# EAGLE board PCB Plates Combined Eagle (EAGLE 9.4.2)
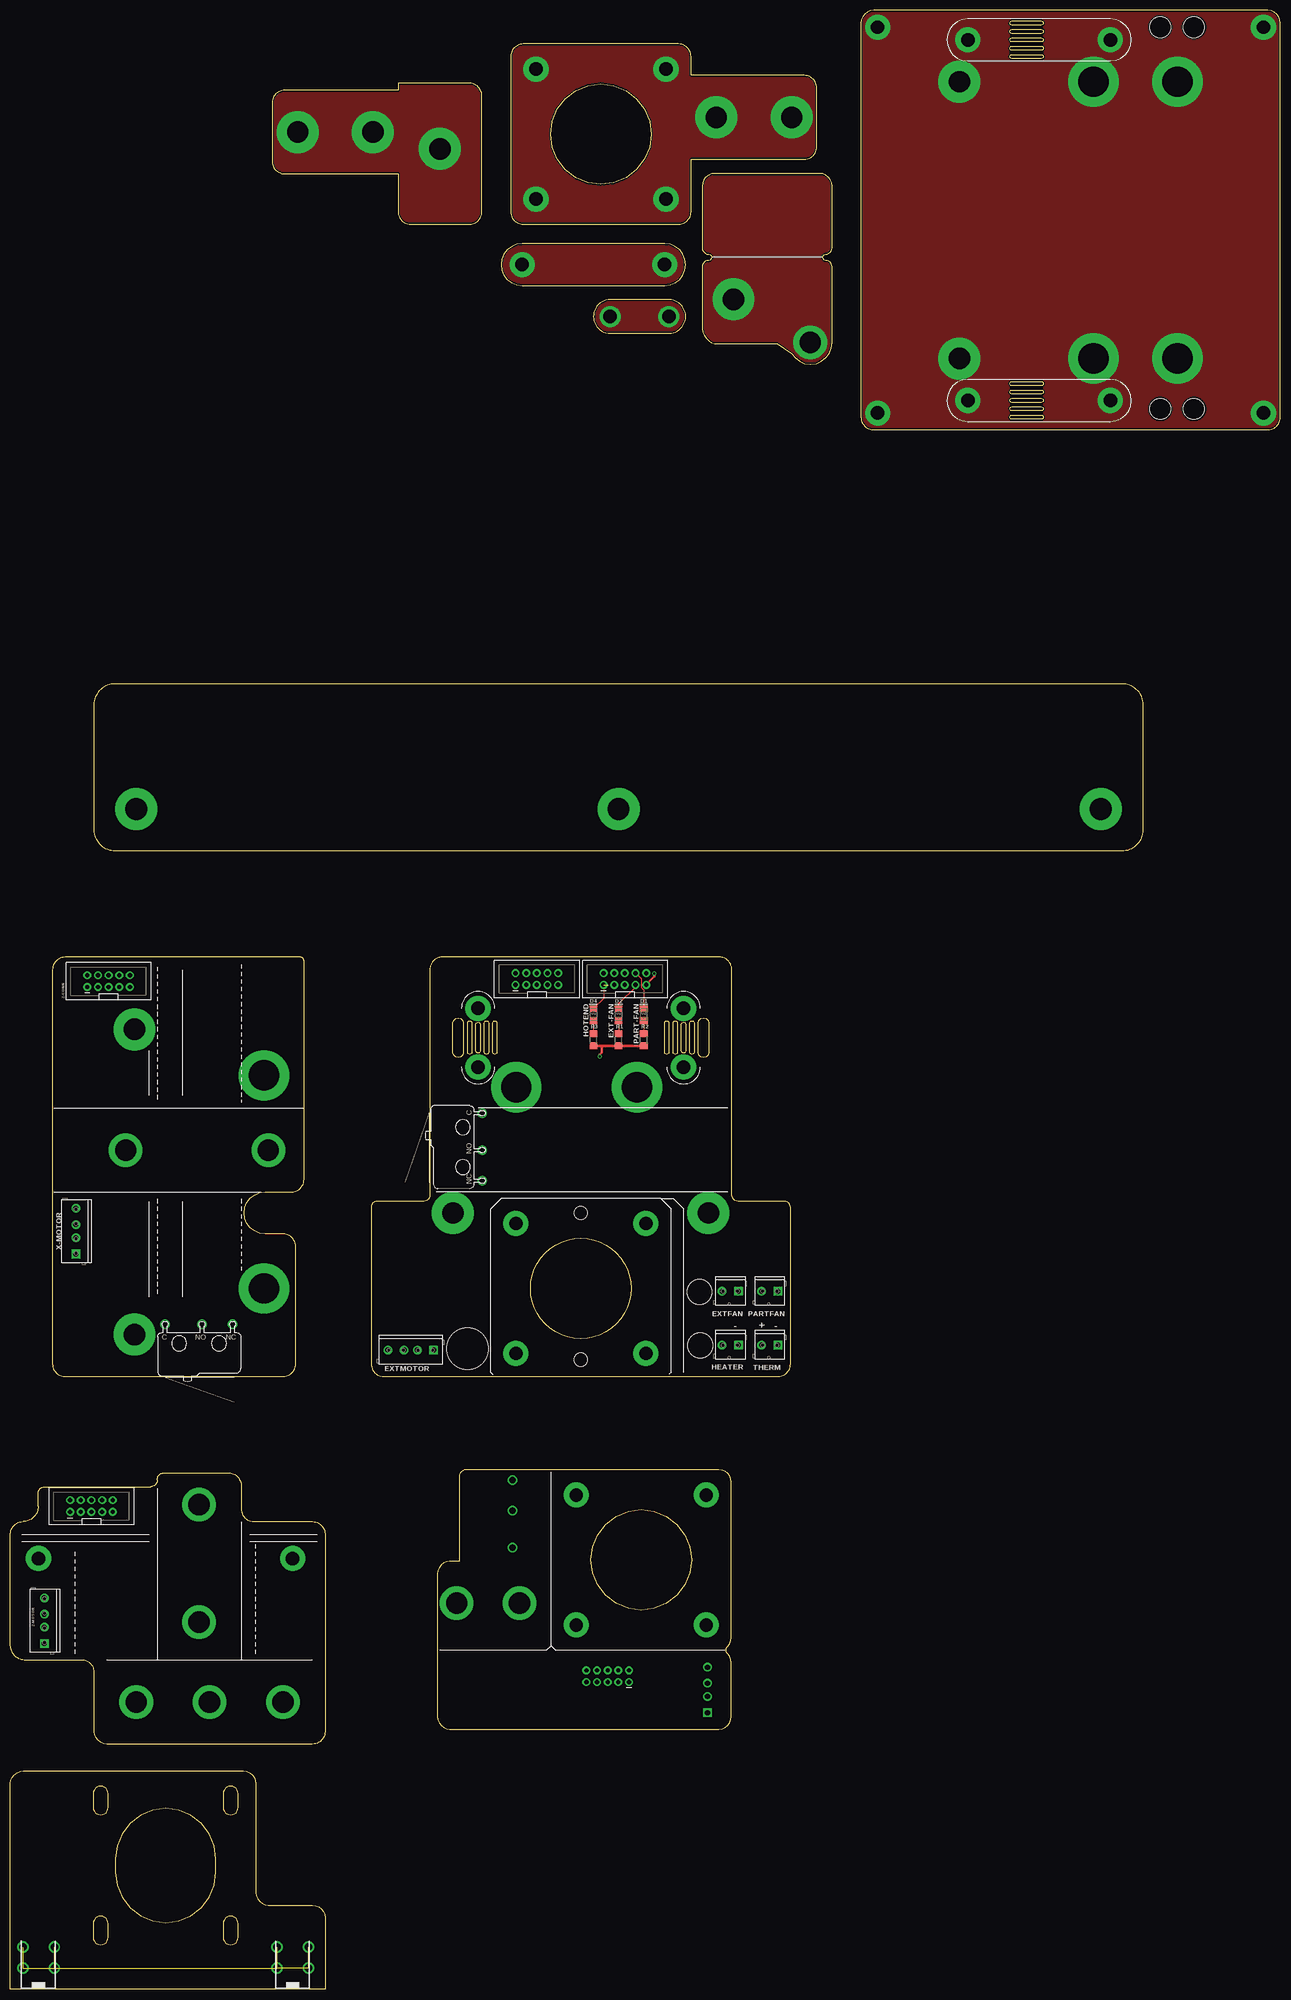
[diagram p0: board, top side]
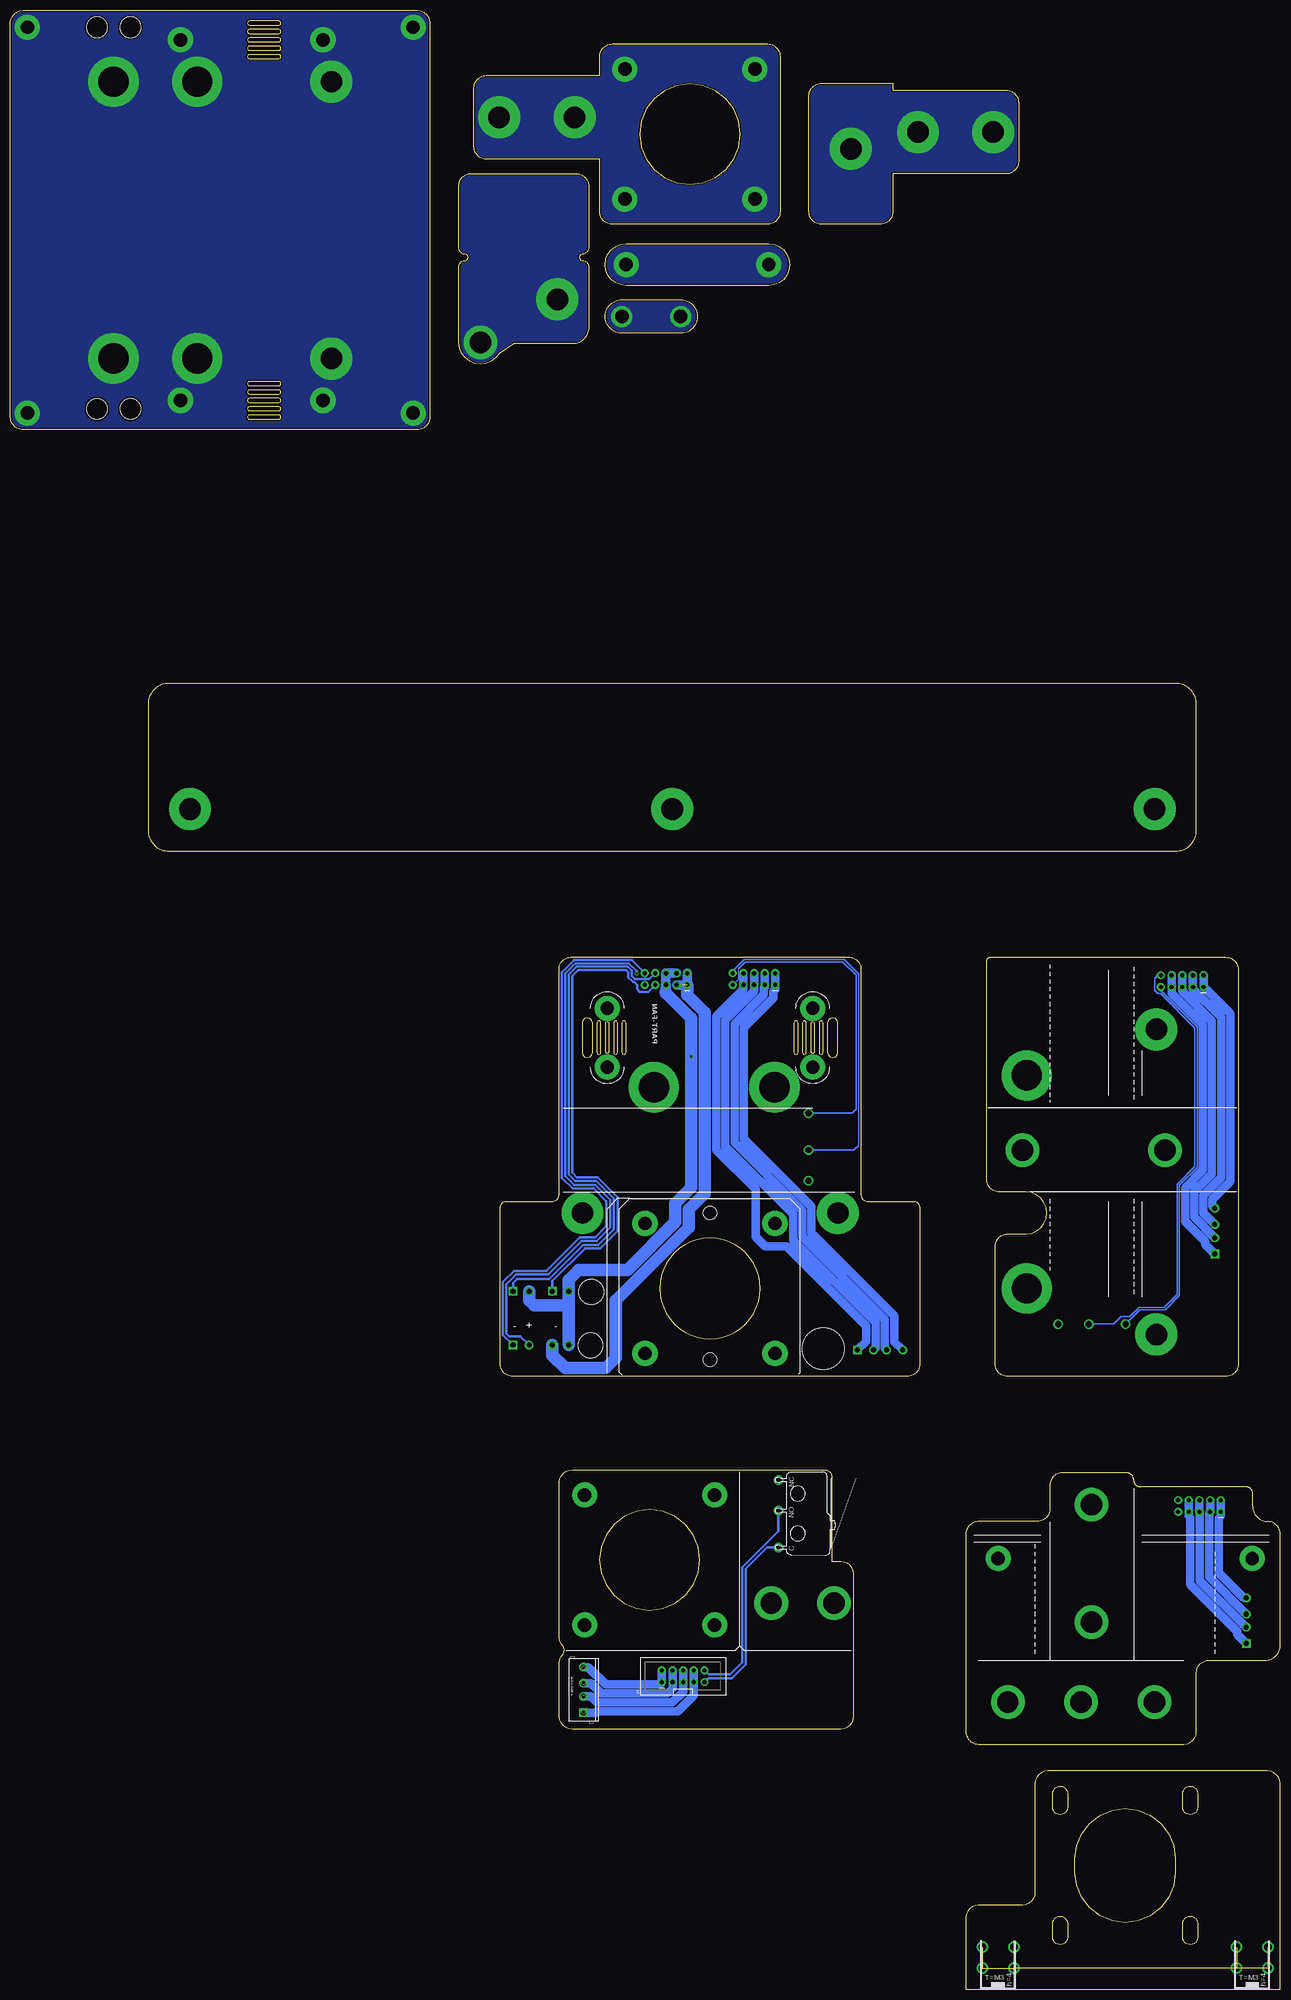
[diagram p1: board, bottom side, seen from below]

Size 302.8 x 471.9 mm. Coordinates in mm from the lower left corner, seen from the top.
Outline: 157,402.92 143,402.92 142.48,402.88 141.97,402.78 141.47,402.61 141,402.38 140.56,402.09 140.17,401.75 139.83,401.35 139.54,400.92 139.3,400.45 139.14,399.95 139.03,399.44 139,398.92 139.03,398.39 139.14,397.88 139.3,397.38 139.54,396.92 139.83,396.48 140.17,396.09 140.56,395.74 141,395.45 141.47,395.22 141.97,395.05 142.48,394.95 143,394.92 157,394.92 157.52,394.95 158.03,395.05 158.53,395.22 159,395.45 159.44,395.74 159.83,396.09 160.17,396.48 160.46,396.92 160.7,397.38 160.86,397.88 160.97,398.39 161,398.92 160.97,399.44 160.86,399.95 160.7,400.45 160.46,400.92 160.17,401.35 159.83,401.75 159.44,402.09 159,402.38 158.53,402.61 158.03,402.78 157.52,402.88 157,402.92
Outline: 122,416.28 120.71,416.11 119.5,415.61 118.46,414.82 117.67,413.78 117.17,412.57 117,411.28 117.17,409.99 117.67,408.78 118.46,407.75 119.5,406.95 120.71,406.45 122,406.28 156,406.28 157.29,406.45 158.5,406.95 159.54,407.75 160.33,408.78 160.83,409.99 161,411.28 160.83,412.57 160.33,413.78 159.54,414.82 158.5,415.61 157.29,416.11 156,416.28 122,416.28
Outline: 100,243.2 100,189.4 99.95,189.01 99.8,188.65 99.56,188.34 99.25,188.1 98.89,187.95 98.5,187.9 87.5,187.9 87.11,187.85 86.75,187.7 86.44,187.46 86.2,187.15 86.05,186.79 86,186.4 86,149.1 86.03,148.71 86.1,148.32 86.23,147.95 86.4,147.6 86.62,147.27 86.88,146.98 87.17,146.72 87.5,146.5 87.85,146.33 88.22,146.2 88.61,146.13 89,146.1 183,146.1 183.39,146.13 183.78,146.2 184.15,146.33 184.5,146.5 184.83,146.72 185.12,146.98 185.38,147.27 185.6,147.6 185.77,147.95 185.9,148.32 185.97,148.71 186,149.1 186,186.4 185.95,186.79 185.8,187.15 185.56,187.46 185.25,187.7 184.89,187.85 184.5,187.9 173.5,187.9 173.11,187.95 172.75,188.1 172.44,188.34 172.2,188.65 172.05,189.01 172,189.4 172,243.2 arc90 169.1,246.1 102.9,246.1 arc90 100,243.2
Outline: 144.49,175.58 145.52,174.4 146.39,173.1 147.09,171.69 147.59,170.21 147.9,168.67 148,167.1 147.9,165.53 147.59,163.99 147.09,162.51 146.39,161.1 145.52,159.79 144.49,158.61 143.31,157.58 142,156.71 140.59,156.01 139.11,155.51 137.57,155.2 136,155.1 134.43,155.2 132.89,155.51 131.41,156.01 130,156.71 128.69,157.58 127.52,158.61 126.48,159.79 125.61,161.1 124.91,162.51 124.41,163.99 124.1,165.53 124,167.1 124.1,168.67 124.41,170.21 124.91,171.69 125.61,173.1 126.48,174.4 127.52,175.58 128.69,176.62 130,177.49 131.41,178.19 132.89,178.69 134.43,179 136,179.1 137.57,179 139.11,178.69 140.59,178.19 142,177.49 143.31,176.62 144.49,175.58
Outline: 109.07,223.15 109,223.4 109,230.4 109.07,230.65 109.25,230.83 109.5,230.9 109.75,230.83 109.93,230.65 110,230.4 110,223.4 109.93,223.15 109.75,222.97 109.5,222.9 109.25,222.97 109.07,223.15
Outline: 162.75,222.97 162.5,222.9 162.25,222.97 162.07,223.15 162,223.4 162,230.4 162.07,230.65 162.25,230.83 162.5,230.9 162.75,230.83 162.93,230.65 163,230.4 163,223.4 162.93,223.15 162.75,222.97
Outline: 160,223.7 160,230.1 160.07,230.35 160.25,230.53 160.5,230.6 160.75,230.53 160.93,230.35 161,230.1 161,223.7 160.93,223.45 160.75,223.27 160.5,223.2 160.25,223.27 160.07,223.45 160,223.7
Outline: 164.62,231.48 165.25,231.65 165.88,231.48 166.33,231.02 166.5,230.4 166.5,223.4 166.33,222.77 165.88,222.32 165.25,222.15 164.62,222.32 164.17,222.77 164,223.4 164,230.4 164.17,231.02 164.62,231.48
Outline: 106.12,231.48 106.75,231.65 107.38,231.48 107.83,231.02 108,230.4 108,223.4 107.83,222.77 107.38,222.32 106.75,222.15 106.12,222.32 105.67,222.77 105.5,223.4 105.5,230.4 105.67,231.02 106.12,231.48
Outline: 113,230.4 113.07,230.65 113.25,230.83 113.5,230.9 113.75,230.83 113.93,230.65 114,230.4 114,223.4 113.93,223.15 113.75,222.97 113.5,222.9 113.25,222.97 113.07,223.15 113,223.4 113,230.4
Outline: 111.5,230.6 111.75,230.53 111.93,230.35 112,230.1 112,223.7 111.93,223.45 111.75,223.27 111.5,223.2 111.25,223.27 111.07,223.45 111,223.7 111,230.1 111.07,230.35 111.25,230.53 111.5,230.6
Outline: 156,230.4 156.07,230.65 156.25,230.83 156.5,230.9 156.75,230.83 156.93,230.65 157,230.4 157,223.4 156.93,223.15 156.75,222.97 156.5,222.9 156.25,222.97 156.07,223.15 156,223.4 156,230.4
Outline: 115.75,230.83 115.93,230.65 116,230.4 116,223.4 115.93,223.15 115.75,222.97 115.5,222.9 115.25,222.97 115.07,223.15 115,223.4 115,230.4 115.07,230.65 115.25,230.83 115.5,230.9 115.75,230.83
Outline: 158.75,230.83 158.93,230.65 159,230.4 159,223.4 158.93,223.15 158.75,222.97 158.5,222.9 158.25,222.97 158.07,223.15 158,223.4 158,230.4 158.07,230.65 158.25,230.83 158.5,230.9 158.75,230.83
Outline: 70,193.1 70,245.2 arc90 69.1,246.1 13,246.1 12.61,246.07 12.22,246 11.85,245.87 11.5,245.7 11.17,245.48 10.88,245.22 10.62,244.93 10.4,244.6 10.23,244.25 10.1,243.88 10.03,243.49 10,243.1 10,149.1 10.03,148.71 10.1,148.32 10.23,147.95 10.4,147.6 10.62,147.27 10.88,146.98 11.17,146.72 11.5,146.5 11.85,146.33 12.22,146.2 12.61,146.13 13,146.1 65,146.1 65.39,146.13 65.78,146.2 66.15,146.33 66.5,146.5 66.83,146.72 67.12,146.98 67.38,147.27 67.6,147.6 67.77,147.95 67.9,148.32 67.97,148.71 68,149.1 68,177.1 67.97,177.49 67.9,177.88 67.77,178.25 67.6,178.6 67.38,178.93 67.12,179.22 66.83,179.48 66.5,179.7 66.15,179.87 65.78,180 65.39,180.07 65,180.1 60.7,180.1 59.41,180.27 58.2,180.77 57.16,181.56 56.37,182.6 55.87,183.81 55.7,185.1 55.87,186.39 56.37,187.6 57.16,188.64 58.2,189.43 59.41,189.93 60.7,190.1 67,190.1 67.39,190.13 67.78,190.2 68.15,190.33 68.5,190.5 68.83,190.72 69.12,190.98 69.38,191.27 69.6,191.6 69.77,191.95 69.9,192.32 69.97,192.71 70,193.1
Outline: 168.9,123.85 108.6,123.85 108.19,123.79 107.8,123.63 107.47,123.38 107.21,123.05 107.06,122.66 107,122.25 107,102 104.8,102 104.02,101.9 103.3,101.6 102.68,101.12 102.2,100.5 101.9,99.78 101.8,99 101.8,65 101.9,64.22 102.2,63.5 102.68,62.88 103.3,62.4 104.02,62.1 104.8,62 168.9,62 169.68,62.1 170.4,62.4 171.02,62.88 171.5,63.5 171.8,64.22 171.9,65 171.9,77.85 171.8,78.62 171.5,79.35 171.02,79.97 170.82,80.22 170.7,80.52 170.66,80.85 170.7,81.17 170.82,81.47 171.02,81.72 171.5,82.35 171.8,83.07 171.9,83.85 171.9,120.85 171.8,121.62 171.5,122.35 171.02,122.97 170.4,123.44 169.68,123.74 168.9,123.85
Outline: 138.4,102.35 138.81,105.45 140.01,108.35 141.92,110.83 144.4,112.74 147.29,113.94 150.4,114.35 153.51,113.94 156.4,112.74 158.88,110.83 160.79,108.35 161.99,105.45 162.4,102.35 161.99,99.24 160.79,96.35 158.88,93.86 156.4,91.95 153.51,90.75 150.4,90.35 147.29,90.75 144.4,91.95 141.92,93.86 140.01,96.35 138.81,99.24 138.4,102.35
Outline: 205.8,371.9 299.8,371.9 300.19,371.93 300.58,372 300.95,372.13 301.3,372.3 301.63,372.52 301.92,372.78 302.18,373.07 302.4,373.4 302.57,373.75 302.7,374.12 302.77,374.51 302.8,374.9 302.8,468.9 302.7,469.68 302.4,470.4 301.92,471.02 301.3,471.5 300.58,471.8 299.8,471.9 205.8,471.9 205.02,471.8 204.3,471.5 203.68,471.02 203.2,470.4 202.9,469.68 202.8,468.9 202.8,374.9 202.83,374.51 202.9,374.12 203.03,373.75 203.2,373.4 203.42,373.07 203.68,372.78 203.97,372.52 204.3,372.3 204.65,372.13 205.02,372 205.41,371.93 205.8,371.9
Outline: 245.8,378.4 238.8,378.4 238.55,378.47 238.37,378.65 238.3,378.9 238.37,379.15 238.55,379.33 238.8,379.4 245.8,379.4 246.05,379.33 246.23,379.15 246.3,378.9 246.23,378.65 246.05,378.47 245.8,378.4
Outline: 246.23,377.15 246.3,376.9 246.23,376.65 246.05,376.47 245.8,376.4 238.8,376.4 238.55,376.47 238.37,376.65 238.3,376.9 238.37,377.15 238.55,377.33 238.8,377.4 245.8,377.4 246.05,377.33 246.23,377.15
Outline: 246.23,375.15 246.3,374.9 246.23,374.65 246.05,374.47 245.8,374.4 238.8,374.4 238.55,374.47 238.37,374.65 238.3,374.9 238.37,375.15 238.55,375.33 238.8,375.4 245.8,375.4 246.05,375.33 246.23,375.15
Outline: 246.23,381.15 246.3,380.9 246.23,380.65 246.05,380.47 245.8,380.4 238.8,380.4 238.55,380.47 238.37,380.65 238.3,380.9 238.37,381.15 238.55,381.33 238.8,381.4 245.8,381.4 246.05,381.33 246.23,381.15
Outline: 246.23,383.15 246.3,382.9 246.23,382.65 246.05,382.47 245.8,382.4 238.8,382.4 238.55,382.47 238.37,382.65 238.3,382.9 238.37,383.15 238.55,383.33 238.8,383.4 245.8,383.4 246.05,383.33 246.23,383.15
Outline: 246.23,469.15 246.3,468.9 246.23,468.65 246.05,468.47 245.8,468.4 238.8,468.4 238.55,468.47 238.37,468.65 238.3,468.9 238.37,469.15 238.55,469.33 238.8,469.4 245.8,469.4 246.05,469.33 246.23,469.15
Outline: 246.23,467.15 246.3,466.9 246.23,466.65 246.05,466.47 245.8,466.4 238.8,466.4 238.55,466.47 238.37,466.65 238.3,466.9 238.37,467.15 238.55,467.33 238.8,467.4 245.8,467.4 246.05,467.33 246.23,467.15
Outline: 246.23,465.15 246.3,464.9 246.23,464.65 246.05,464.47 245.8,464.4 238.8,464.4 238.55,464.47 238.37,464.65 238.3,464.9 238.37,465.15 238.55,465.33 238.8,465.4 245.8,465.4 246.05,465.33 246.23,465.15
Outline: 246.23,463.15 246.3,462.9 246.23,462.65 246.05,462.47 245.8,462.4 238.8,462.4 238.55,462.47 238.37,462.65 238.3,462.9 238.37,463.15 238.55,463.33 238.8,463.4 245.8,463.4 246.05,463.33 246.23,463.15
Outline: 246.23,461.15 246.3,460.9 246.23,460.65 246.05,460.47 245.8,460.4 238.8,460.4 238.55,460.47 238.37,460.65 238.3,460.9 238.37,461.15 238.55,461.33 238.8,461.4 245.8,461.4 246.05,461.33 246.23,461.15
Outline: 195.9,415.28 195.9,430.03 195.8,430.8 195.5,431.53 195.02,432.15 194.4,432.63 193.68,432.92 192.9,433.03 167.96,433.03 167.18,432.92 166.46,432.63 165.84,432.15 165.36,431.53 165.06,430.8 164.96,430.03 164.96,415.28 165.01,414.89 165.16,414.53 165.4,414.22 165.71,413.98 166.07,413.83 166.46,413.78 166.83,413.68 167.11,413.4 167.21,413.03 167.11,412.65 166.83,412.38 166.46,412.28 166.07,412.23 165.71,412.08 165.4,411.84 165.16,411.53 165.01,411.17 164.96,410.78 164.96,396.03 165.11,395.22 165.43,394.46 165.88,393.77 166.45,393.18 167.13,392.72 167.89,392.39 182.79,392.39 186.3,390.1 187.12,389.04 188.19,388.22 189.43,387.71 190.76,387.53 192.09,387.71 193.33,388.22 194.39,389.04 195.21,390.1 195.72,391.34 195.9,392.68 195.9,410.78 195.85,411.17 195.7,411.53 195.46,411.84 195.15,412.08 194.79,412.23 194.4,412.28 194.03,412.38 193.75,412.65 193.65,413.03 193.75,413.4 194.03,413.68 194.4,413.78 194.79,413.83 195.15,413.98 195.46,414.22 195.7,414.53 195.85,414.89 195.9,415.28
Outline: 0,49.1 0.12,49.78 0.44,50.5 0.93,51.12 1.55,51.6 2.29,51.9 3.07,52 55.51,52 56.28,51.9 57.01,51.6 57.63,51.12 58.1,50.5 58.4,49.78 58.51,49 58.51,23 58.61,22.22 58.91,21.5 59.38,20.88 60.01,20.4 60.73,20.1 61.51,20 72,20 72.78,19.9 73.5,19.6 74.12,19.12 74.6,18.5 74.9,17.78 75,17 75,0 0,0 0,49.1
Outline: 48.6,24.75 49,27.85 49,31.05 48.6,34.16 47.4,37.05 45.49,39.54 43,41.45 40.11,42.64 37,43.05 33.9,42.64 31.01,41.45 28.52,39.54 26.61,37.05 25.41,34.16 25,31.05 25,27.85 25.41,24.75 26.61,21.85 28.52,19.37 31.01,17.46 33.9,16.26 37,15.85 40.11,16.26 43,17.46 45.49,19.37 47.4,21.85 48.6,24.75
Outline: 23.24,11.89 23.3,12.35 23.3,15.55 23.24,16.02 23.06,16.45 22.78,16.83 22.41,17.11 21.97,17.29 21.5,17.35 21.04,17.29 20.61,17.11 20.23,16.83 19.95,16.45 19.77,16.02 19.7,15.55 19.7,12.35 19.77,11.89 19.95,11.45 20.23,11.08 20.61,10.79 21.04,10.61 21.5,10.55 21.97,10.61 22.41,10.79 22.78,11.08 23.06,11.45 23.24,11.89
Outline: 23.24,42.89 23.3,43.35 23.3,46.55 23.24,47.02 23.06,47.45 22.78,47.83 22.41,48.11 21.97,48.29 21.5,48.35 21.04,48.29 20.61,48.11 20.23,47.83 19.95,47.45 19.77,47.02 19.7,46.55 19.7,43.35 19.77,42.89 19.95,42.45 20.23,42.08 20.61,41.79 21.04,41.61 21.5,41.55 21.97,41.61 22.41,41.79 22.78,42.08 23.06,42.45 23.24,42.89
Outline: 54.24,42.89 54.3,43.35 54.3,46.55 54.24,47.02 54.06,47.45 53.78,47.83 53.41,48.11 52.97,48.29 52.51,48.35 52.04,48.29 51.61,48.11 51.23,47.83 50.95,47.45 50.77,47.02 50.7,46.55 50.7,43.35 50.77,42.89 50.95,42.45 51.23,42.08 51.61,41.79 52.04,41.61 52.51,41.55 52.97,41.61 53.41,41.79 53.78,42.08 54.06,42.45 54.24,42.89
Outline: 54.24,11.89 54.3,12.35 54.3,15.55 54.24,16.02 54.06,16.45 53.78,16.83 53.41,17.11 52.97,17.29 52.51,17.35 52.04,17.29 51.61,17.11 51.23,16.83 50.95,16.45 50.77,16.02 50.7,15.55 50.7,12.35 50.77,11.89 50.95,11.45 51.23,11.08 51.61,10.79 52.04,10.61 52.51,10.55 52.97,10.61 53.41,10.79 53.78,11.08 54.06,11.45 54.24,11.89
Outline: 72,58.4 23,58.4 22.22,58.5 21.5,58.8 20.88,59.28 20.4,59.9 20.1,60.62 20,61.4 20,75.5 arc90 17.1,78.4 3.6,78.4 arc-90 0,82 0,108.5 0.03,108.89 0.1,109.28 0.23,109.65 0.4,110 0.62,110.33 0.88,110.62 1.17,110.88 1.5,111.1 1.85,111.27 2.22,111.4 2.61,111.47 3,111.5 arc90 6.6,115.1 6.6,118.2 arc-90 8.2,119.8 33.4,119.8 arc90 35,121.4 35,121.5 arc-90 36.6,123.1 52,123.1 52.39,123.07 52.78,123 53.15,122.87 53.5,122.7 53.83,122.48 54.12,122.22 54.38,121.93 54.6,121.6 54.77,121.25 54.9,120.88 54.97,120.49 55,120.1 55,114.5 55.03,114.11 55.1,113.72 55.23,113.35 55.4,113 55.62,112.67 55.88,112.38 56.17,112.12 56.5,111.9 56.85,111.73 57.22,111.6 57.61,111.53 58,111.5 72,111.5 72.39,111.47 72.78,111.4 73.15,111.27 73.5,111.1 73.83,110.88 74.12,110.62 74.38,110.33 74.6,110 74.77,109.65 74.9,109.28 74.97,108.89 75,108.5 75,61.4 74.97,61.01 74.9,60.62 74.77,60.25 74.6,59.9 74.38,59.57 74.12,59.28 73.83,59.02 73.5,58.8 73.15,58.63 72.78,58.5 72.39,58.43 72,58.4
Outline: 162.29,436.41 189.29,436.41 189.68,436.44 190.06,436.51 190.44,436.64 190.79,436.81 191.11,437.03 191.41,437.29 191.67,437.59 191.88,437.91 192.06,438.26 192.19,438.63 192.26,439.02 192.29,439.41 192.29,453.41 192.26,453.8 192.19,454.19 192.06,454.56 191.88,454.91 191.67,455.24 191.41,455.53 191.11,455.79 190.79,456.01 190.44,456.18 190.06,456.31 189.68,456.39 189.29,456.41 162.29,456.41 162.29,460.91 162.26,461.3 162.19,461.69 162.06,462.06 161.88,462.41 161.67,462.74 161.41,463.03 161.11,463.29 160.79,463.51 160.44,463.68 160.06,463.81 159.68,463.89 159.29,463.91 122.29,463.91 121.9,463.89 121.51,463.81 121.14,463.68 120.79,463.51 120.46,463.29 120.17,463.03 119.91,462.74 119.69,462.41 119.52,462.06 119.39,461.69 119.31,461.3 119.29,460.91 119.29,423.91 119.31,423.52 119.39,423.13 119.52,422.76 119.69,422.41 119.91,422.09 120.17,421.79 120.46,421.53 120.79,421.31 121.14,421.14 121.51,421.01 121.9,420.94 122.29,420.91 159.29,420.91 159.68,420.94 160.06,421.01 160.44,421.14 160.79,421.31 161.11,421.53 161.41,421.79 161.67,422.09 161.88,422.41 162.06,422.76 162.19,423.13 162.26,423.52 162.29,423.91 162.29,436.41
Outline: 140.79,454.41 143.89,454 146.79,452.8 149.27,450.9 151.18,448.41 152.38,445.52 152.79,442.41 152.38,439.31 151.18,436.41 149.27,433.93 146.79,432.02 143.89,430.82 140.79,430.41 137.68,430.82 134.79,432.02 132.3,433.93 130.39,436.41 129.2,439.31 128.79,442.41 129.2,445.52 130.39,448.41 132.3,450.9 134.79,452.8 137.68,454 140.79,454.41
Outline: 62.42,449.92 62.42,435.92 62.45,435.53 62.52,435.14 62.65,434.77 62.82,434.42 63.04,434.09 63.3,433.8 63.59,433.54 63.92,433.32 64.27,433.15 64.64,433.02 65.03,432.95 65.42,432.92 92.42,432.92 92.42,423.91 92.44,423.52 92.52,423.13 92.65,422.76 92.82,422.41 93.04,422.09 93.3,421.79 93.59,421.53 93.92,421.31 94.27,421.14 94.64,421.01 95.03,420.94 95.42,420.91 109.42,420.91 109.81,420.94 110.2,421.01 110.57,421.14 110.92,421.31 111.25,421.53 111.54,421.79 111.8,422.09 112.02,422.41 112.19,422.76 112.32,423.13 112.39,423.52 112.42,423.91 112.42,451.52 112.39,451.91 112.32,452.3 112.19,452.67 112.02,453.02 111.8,453.35 111.54,453.64 111.25,453.9 110.92,454.12 110.57,454.29 110.2,454.42 109.81,454.49 109.42,454.52 92.42,454.52 92.42,452.92 65.42,452.92 65.03,452.89 64.64,452.82 64.27,452.69 63.92,452.52 63.59,452.3 63.3,452.04 63.04,451.75 62.82,451.42 62.65,451.07 62.52,450.7 62.45,450.31 62.42,449.92
Outline: 20,276.4 20,306.4 arc-90 25,311.4 265,311.4 arc-90 270,306.4 270,276.4 arc-90 265,271.4 25,271.4 arc-90 20,276.4
Copper layers (1*16): Top 0.035mm / dielectric 1.5mm / Bottom 0.035mm
Design rules "default *": minimum track width 6mil, minimum drill 0.35mm, track to track 6mil, track to pad 6mil, pad to pad 6mil, via to via 6mil, smd to smd 6mil, copper to edge 10mil, drill to drill 6mil, minimum pad ring 10mil, minimum via ring 8mil, stop-mask expansion 4mil, vias tented up to drill 0mil, thermal gap 10mil
Net classes: 0 default: width 0.203 mm, clearance 0.152 mm
Holes 6 mm at 164.5,153.5 164.3,166.3
Holes 10 mm at 109,152.7
Holes 3.2 mm at 136,185.1 136,150.1
Holes 5 mm at 274.17,467.9 282.17,467.9 274.17,376.9 282.17,376.9

## Footprints (pad centres in the part's own frame; a part is rotated, then mirrored left to right if it is on the bottom)
PCB2-M3 = drill 1.8: P$1 -3.75,-5; P$2 3.75,-5; P$3 3.75,-10; P$4 -3.75,-10
FKIT-LED-1206 = smd 1.6 x 1.803: A -1.422,0; C 1.422,0
SCREWTERMINAL-3.5MM-2_LOCK = drill 1.2 pad 2.032 square: 1 -0.178,0 | drill 1.2 pad 2.032: 2 3.678,0
SCREWTERMINAL-3.5MM-4_LOCK = drill 1.2 pad 2.032 square: 1 -0.178,0 | drill 1.2 pad 2.032: 2 3.678,0; 3 6.822,0; 4 10.678,0
2X5-SHROUDED_LOCK = drill 1.016 pad 1.88: 1 -1.397,5.08; 2 1.397,5.08; 3 -1.397,2.54; 4 1.397,2.54; 5 -1.397,0; 6 1.397,0; 7 -1.397,-2.54; 8 1.397,-2.54; 9 -1.397,-5.08; 10 1.397,-5.08
R1206 = smd 1.6 x 1.803: 1 -1.422,0; 2 1.422,0
LEVERMICROPCB-LEFTANGLE = drill 1.5: C 7.3,-7.1; NC -8.8,-7.1; NO -1.5,-7.1

## Placement (x,y rotation side)
CON1  PCB-2M3  [PCB2-M3]  67.3,0 180 bottom
CON7  PCB-2M3  [PCB2-M3]  6.7,0 180 bottom
D1  [FKIT-LED-1206]  151,232.4 90 top
D2  [FKIT-LED-1206]  145,232.4 90 top
D4  [FKIT-LED-1206]  139,232.4 90 top
EXTFAN  [SCREWTERMINAL-3.5MM-2_LOCK]  173.4,166.4 180 top
EXTMOTOR  [SCREWTERMINAL-3.5MM-4_LOCK]  100.7,152.4 180 top
HEATER  [SCREWTERMINAL-3.5MM-2_LOCK]  173.4,153.6 180 top
J1  [2X5-SHROUDED_LOCK]  125.5,240.9 90 top
J2  [2X5-SHROUDED_LOCK]  19.3,115.2 90 top
J3  [2X5-SHROUDED_LOCK]  142.4,74.6 90 bottom
J4  [2X5-SHROUDED_LOCK]  146.5,240.9 90 top
J5  [2X5-SHROUDED_LOCK]  -175,-12.6 0 top  (outside the outline)
J6  [2X5-SHROUDED_LOCK]  -175,-56.6 0 top  (outside the outline)
J7  [2X5-SHROUDED_LOCK]  -175,-78.6 0 top  (outside the outline)
J8  [2X5-SHROUDED_LOCK]  -174.9,-100.9 0 top  (outside the outline)
PARTFAN  [SCREWTERMINAL-3.5MM-2_LOCK]  182.8,166.4 180 top
R1  [R1206]  145,226.4 270 top
R2  [R1206]  151,226.4 270 top
R3  [R1206]  139,226.4 270 top
THERM  [SCREWTERMINAL-3.5MM-2_LOCK]  182.8,153.6 180 top
U$1  Lever Microswitch Leftangle PCB mount, with Roller style lever, with a red roller  [LEVERMICROPCB-LEFTANGLE]  112.6,112.6 270 bottom
X-MOTOR  [SCREWTERMINAL-3.5MM-4_LOCK]  15.6,175.5 90 top
XENDSTOP  Lever Microswitch Leftangle PCB mount, with Roller style lever, with a red roller  [LEVERMICROPCB-LEFTANGLE]  105.4,201.6 90 top
Y-MOTOR  [SCREWTERMINAL-3.5MM-4_LOCK]  166.2,66.1 90 bottom
Z-CONN  [2X5-SHROUDED_LOCK]  23.4,240.4 90 top
Z-CONN1  [2X5-SHROUDED_LOCK]  -175,-34.6 0 top  (outside the outline)
Z-MOTOR  [SCREWTERMINAL-3.5MM-4_LOCK]  8.1,82.6 90 top
ZENDSTOP  Lever Microswitch Leftangle PCB mount, with Roller style lever, with a red roller  [LEVERMICROPCB-LEFTANGLE]  44.17,151.5 180 top

## Library data of the parts
CON1 CON7 = Screw Terminals
D1 D2 D4 = SparkFun-LED
EXTFAN HEATER PARTFAN THERM = SparkFun-Connectors; PROD_ID: CONN-08399
EXTMOTOR X-MOTOR Y-MOTOR Z-MOTOR = SparkFun-Connectors
J1-J8 Z-CONN Z-CONN1 = SparkFun-Connectors; PROD_ID: CONN-08671; SF_ID: PRT-08506
R1-R3 = rcl; SPICEPREFIX: R
U$1 XENDSTOP ZENDSTOP = Lever Microswitch Right Angle

## Nets
24V: EXTFAN.2 HEATER.2 J4.4 J4.5 J4.6 PARTFAN.2 R1.2 R2.2 R3.2
24V1: J5.4 J5.5 J5.6
E-MOTOR-1: EXTMOTOR.1 J1.7 J1.8
E-MOTOR-2: EXTMOTOR.2 J1.5 J1.6
E-MOTOR-3: EXTMOTOR.3 J1.3 J1.4
E-MOTOR-4: EXTMOTOR.4 J1.1 J1.2
E-MOTOR-5: J7.1 J7.2
E-MOTOR-6: J7.3 J7.4
E-MOTOR-7: J7.5 J7.6
E-MOTOR-8: J7.7 J7.8
EXT-FAN-NEG: D2.C EXTFAN.1 J4.7
EXT-FAN-NEG1: J5.7
HOTEND-NEG: D4.C HEATER.1 J4.1 J4.2 J4.3
HOTEND-NEG1: J5.1 J5.2 J5.3
N$1: XENDSTOP.NC
N$12: D2.A R1.1
N$48: D1.A R2.1
N$49: D4.A R3.1
PART-FAN-NEG: D1.C J4.8 PARTFAN.1
PART-FAN-NEG1: J5.8
THERM+: J4.10 THERM.1
THERM+1: J5.10
THERM-: J4.9 THERM.2
THERM-1: J5.9
X-END-C: J1.9 XENDSTOP.C
X-END-C1: J7.9
X-END-O: J1.10 XENDSTOP.NO
X-END-O1: J7.10
X-MOTOR-1: X-MOTOR.1 Z-CONN.7 Z-CONN.8
X-MOTOR-2: X-MOTOR.2 Z-CONN.5 Z-CONN.6
X-MOTOR-3: X-MOTOR.3 Z-CONN.3 Z-CONN.4
X-MOTOR-4: X-MOTOR.4 Z-CONN.1 Z-CONN.2
X-MOTOR-5: Z-CONN1.7 Z-CONN1.8
X-MOTOR-6: Z-CONN1.5 Z-CONN1.6
X-MOTOR-7: Z-CONN1.3 Z-CONN1.4
X-MOTOR-8: Z-CONN1.1 Z-CONN1.2
Y-ENDSTOP-C: J3.9 U$1.C
Y-ENDSTOP-C1: J6.9
Y-ENDSTOP-NO: J3.10 U$1.NO
Y-ENDSTOP-NO1: J6.10
Y-MOTOR-1: J3.7 J3.8 Y-MOTOR.1
Y-MOTOR-2: J3.5 J3.6 Y-MOTOR.2
Y-MOTOR-3: J3.3 J3.4 Y-MOTOR.3
Y-MOTOR-4: J3.1 J3.2 Y-MOTOR.4
Y-MOTOR-5: J6.1 J6.2
Y-MOTOR-6: J6.3 J6.4
Y-MOTOR-7: J6.5 J6.6
Y-MOTOR-8: J6.7 J6.8
Z-ENDSTOP-C: Z-CONN.9 ZENDSTOP.C
Z-ENDSTOP-C1: Z-CONN1.9
Z-ENDSTOP-NO: Z-CONN.10 ZENDSTOP.NO
Z-ENDSTOP-NO1: Z-CONN1.10
Z-MOTOR-1: J2.7 J2.8 Z-MOTOR.1
Z-MOTOR-2: J2.5 J2.6 Z-MOTOR.2
Z-MOTOR-3: J2.3 J2.4 Z-MOTOR.3
Z-MOTOR-4: J2.1 J2.2 Z-MOTOR.4
Z-MOTOR-5: J8.1 J8.2
Z-MOTOR-6: J8.3 J8.4
Z-MOTOR-7: J8.5 J8.6
Z-MOTOR-8: J8.7 J8.8
ZMOTORGND: CON1.P$1 CON1.P$2 CON1.P$3 CON1.P$4 CON7.P$1 CON7.P$2 CON7.P$3 CON7.P$4

## Tracks (layer width: path | path; a pad name or v marks a point on that pad's centre or on a via)
24V  (via drill 0.5)
  Top 0.61: R2.2 R1.2 141,224.98 | 141,224.98 R3.2 | v140.5,222.4 140.5,222.9 141,223.4 141,224.98
  Bottom 2.3: J4.5 J4.6 J4.4
  Bottom 2.54: 146.5,237.8 J4.5
  Bottom 3: 169.72,163 EXTFAN.2 169.72,169.08 167.3,171.5 155.66,171.5 144.25,182.91 144.25,187.41 140.5,191.16 v140.5,222.4 140.5,231.5 146.5,237.5 146.5,237.8 | HEATER.2 169.72,163 | PARTFAN.2 179.12,164.22 177.9,163 169.72,163
24V1  (2 unrouted)
BELTCLAMP1  (via drill 3.2 pad 5)
  other vias: 143,398.9 157,398.9
  pour Top (isolate 0.406): 142.5,395 157,395 arc182 157,402.9 142.5,402.9 arc163
  pour Bottom (isolate 0.406): 142.5,395 157,395 arc182 157,402.9 142.5,402.9 arc163
BELTCLAMP2  (via drill 3.2 pad 6)
  other vias: 156,411.3 122,411.3
  pour Top (isolate 0.406): 122,406.3 155.9,406.3 arc184 155.9,416.3 122,416.3 arc178
  pour Bottom (isolate 0.406): 122.1,406.3 156,406.3 arc184 156,416.3 122.1,416.3 arc178
E-MOTOR-1
  Bottom 2: EXTMOTOR.1 98.77,154.5 98.77,158.17 117.7,177.1 122.8,177.1 125.1,179.4 125.1,190.77 134.46,200.12 134.46,231.97 128.03,238.4 128.04,238.4 J1.7 J1.8
E-MOTOR-2
  Bottom 2: EXTMOTOR.2 96.52,152.9 96.52,158.96 116.11,178.55 116.11,184.82 132.31,201.02 132.31,231.08 125.4,237.99 125.4,238.9 125.5,239 J1.5 J1.6
E-MOTOR-3
  Bottom 2: EXTMOTOR.3 94.27,152.8 94.27,159.76 113.95,179.44 113.95,185.71 130.15,201.91 130.15,230.19 123.16,237.18 123.16,238.7 122.96,238.9 J1.3 J1.4
E-MOTOR-4
  Bottom 2: EXTMOTOR.4 92.02,154.4 92.02,160.55 111.8,180.33 111.8,186.6 128,202.8 128,229.3 120.92,236.38 120.92,237.9 120.42,238.4 J1.1 J1.2
E-MOTOR-5  (1 unrouted)
E-MOTOR-6  (1 unrouted)
E-MOTOR-7  (1 unrouted)
E-MOTOR-8  (1 unrouted)
EXT-FAN-NEG
  Top 0.254: J4.7 149.04,239.04 145,235 D2.C
  Bottom 0.61: EXTFAN.1 173.57,168.83 165.8,176.6 162.2,176.6 158,180.8 158,188.8 162.8,193.6 167.8,193.6 168.9,194.7 168.9,241.64 167.44,243.1 155.98,243.1 155.46,242.58 155.46,241.28 154.32,240.14 154.04,240.14 153.4,239.5 153.4,238.5 152.7,237.8 150.74,237.8 J4.7
HOTEND-NEG  (1 unrouted)
  Top 0.254: J4.1 141.42,236.24 D4.C
  Bottom 2.3: J4.3 142.5,239.5 | J4.2 J4.1
  Bottom 3: J4.1 141.42,237.12 137.2,232.9 137.2,189.8 141.1,185.9 141.1,181.6 158.5,164.2 158.5,150.5 160.9,148.1 170.5,148.1 173.57,151.17 HEATER.1
HOTEND-NEG1  (2 unrouted)
N$12
  Top 0.254: D2.A R1.1
N$13  (via drill 5.1 pad 10)
  other vias: 29.57,228.9
N$14  (via drill 5.1 pad 8)
  other vias: 27.47,200.1
N$15  (via drill 7.25 pad 12)
  other vias: 60.47,217.9
N$16  (via drill 5.1 pad 8)
  other vias: 61.47,200.1
N$17  (via drill 7.25 pad 12)
  other vias: 60.47,167.1
N$19  (via drill 5.1 pad 10)
  other vias: 166.4,185.1
N$20  (via drill 3.2 pad 6)
  other vias: 151.5,151.6
N$21  (via drill 3.2 pad 6)
  other vias: 165.9,86.83
N$22  (via drill 3.2 pad 6)
  other vias: 120.5,151.6
N$23  (via drill 5.1 pad 10)
  other vias: 105.5,185.1
N$24  (via drill 3.2 pad 6)
  other vias: 120.5,182.6
N$25  (via drill 3.2 pad 6)
  other vias: 151.5,182.6
N$26  (via drill 7.25 pad 12)
  other vias: 120.6,215.1
N$27  (via drill 5.1 pad 8)
  other vias: 106.4,92.03
N$28  (via drill 5.1 pad 8)
  other vias: 121.4,92.03
N$29  (via drill 7.25 pad 12)
  other vias: 149.4,215.1
N$30  (via drill 3.2 pad 6)
  other vias: 134.9,86.83
N$31  (via drill 3.2 pad 6)
  other vias: 165.9,117.83
N$37  (via drill 5.2 pad 10)
  other vias: 30,281.4
N$38  (via drill 5.2 pad 10)
  other vias: 260,281.4
N$39  (via drill 5.2 pad 10)
  other vias: 145,281.4
N$40  (via drill 5.1 pad 8)
  other vias: 64.99,68.4
N$41  (via drill 5.1 pad 8)
  other vias: 29.99,68.4
N$42  (via drill 5.1 pad 8)
  other vias: 47.49,68.4
N$43  (via drill 3.2 pad 6)
  other vias: 160.5,219.9
N$44  (via drill 3.2 pad 6)
  other vias: 160.5,233.9
N$45  (via drill 3.2 pad 6)
  other vias: 111.5,233.9
N$46  (via drill 3.2 pad 6)
  other vias: 111.5,219.9
N$47  (via drill 5.1 pad 8)
  other vias: 44.99,87.5
N$48
  Top 0.254: D1.A R2.1
N$49
  Top 0.254: D4.A R3.1
N$50  (via drill 3.2 pad 6)
  other vias: 67.29,102.7
N$51  (via drill 5.1 pad 8)
  other vias: 44.99,115.5
PART-FAN-NEG
  Top 0.254: D1.C 151,238.26 150.36,238.9 150.36,240.98 J4.8
  Bottom 0.61: PARTFAN.1 182.97,168.4 181.97,169.4 174.3,169.4 166.2,177.5 162.6,177.5 158.9,181.2 158.9,188.5 163.1,192.7 168.1,192.7 169.7,194.3 169.7,241.92 167.76,243.86 155.66,243.86 154.7,242.9 154.7,241.6 154,240.9 150.44,240.9 J4.8
THERM+
  Bottom 0.61: THERM.1 185.4,156.03 185.4,168.6 182.7,171.3 175,171.3 167,179.3 163.4,179.3 160.7,182 160.7,187.9 163.7,190.9 168.7,190.9 171.3,193.5 171.3,242.5 168.4,245.4 154.68,245.4 J4.10
THERM-  (via drill 0.5)
  Top 0.61: v153.5,242.2 153.5,241.5 151.58,239.58 J4.9
  Bottom 0.61: THERM.2 181.22,155.7 183.9,155.7 184.6,156.4 184.6,168.05 182.25,170.4 174.6,170.4 166.6,178.4 163,178.4 159.8,181.6 159.8,188.2 163.4,191.8 168.4,191.8 170.5,193.9 170.5,242.2 168.08,244.62 155.32,244.62 153.5,242.8 v153.5,242.2
X-END-C
  Bottom 0.254: 129.3,243.3 129.32,243.28 129.32,240.76 J1.9
  Bottom 0.406: XENDSTOP.C 102.1,208.9 101.1,209.9 101.1,241.8 104.3,245 127.6,245 129.3,243.3
X-END-O
  Bottom 0.406: XENDSTOP.NO 101.7,200.1 100.54,201.25 100.54,242.13 103.97,245.56 127.84,245.56 130.58,242.82 J1.10
X-MOTOR-1
  Bottom 2: Z-CONN.8 Z-CONN.7 25.94,237.49 18.46,230.01 18.46,195.34 22.7,191.09 22.7,183.13 17.9,178.32 17.9,177.62 X-MOTOR.1
X-MOTOR-2
  Bottom 2: Z-CONN.6 Z-CONN.5 23.4,237.99 16.3,230.9 16.3,194.44 20.55,190.19 20.55,184.13 X-MOTOR.2
X-MOTOR-3
  Bottom 2: Z-CONN.4 Z-CONN.3 20.86,238.5 14.15,231.79 14.15,193.55 18.4,189.3 18.4,185.12 X-MOTOR.3
X-MOTOR-4
  Bottom 2: Z-CONN.2 Z-CONN.1 12,232.68 12,192.58 16.2,188.38 16.2,186.78 X-MOTOR.4
X-MOTOR-5  (1 unrouted)
X-MOTOR-6  (1 unrouted)
X-MOTOR-7  (1 unrouted)
X-MOTOR-8  (1 unrouted)
XIDLERGND  (via drill 5.1 pad 10)
  other vias: 68.5,442.9 86.4,442.9 102.4,438.9
  pour Top (isolate 0.406): 62.4,450.5 64.8,452.9 92.3,452.9 92.5,453.1 92.5,454.3 110.6,454.3 112.3,452.6 112.3,422.3 110.9,420.9 94.3,420.9 92.3,422.9 92.3,432.5 92.1,432.7 64.7,432.7 62.4,435
  pour Bottom (isolate 0.406): 62.4,450.5 64.8,452.9 92.3,452.9 92.5,453.1 92.5,454.3 110.6,454.3 112.3,452.6 112.3,422.3 110.9,420.9 94.3,420.9 92.3,422.9 92.3,432.5 92.1,432.7 64.7,432.7 62.4,435
XMOTORGND  (via drill 3.2 pad 6, 5.1 pad 10)
  other vias: 125.3,457.9 156.3,457.9 125.3,426.9 156.3,426.9 168.3,446.4 186.3,446.4
  pour Top (isolate 0.406): 119.4,422.7 119.4,462 121.1,463.7 160.4,463.7 162.3,461.8 162.3,456.8 162.6,456.5 190.6,456.5 192.3,454.8 192.3,438 190.8,436.5 162.8,436.5 162.3,436 162.3,422.9 160.4,421 121.1,421
  pour Bottom (isolate 0.406): 119.1,422.8 119.1,462.1 120.8,463.8 160.1,463.8 162,461.9 162,456.9 162.3,456.6 190.3,456.6 192,454.9 192,438.1 190.5,436.6 162.5,436.6 162,436.1 162,423 160.1,421.1 120.8,421.1
Y-ENDSTOP-C
  Bottom 0.61: U$1.C 122.4,105.3 127.44,100.26 127.44,77.46 130.8,74.1 136.42,74.1 J3.9
Y-ENDSTOP-NO
  Bottom 0.61: J3.10 136.32,75 131.22,75 128.3,77.92 128.3,100.6 119.7,109.2 U$1.NO
Y-MOTOR-1
  Bottom 2: Y-MOTOR.1 166.1,65.82 163.28,65.82 162.91,66.19 143.7,66.19 139.86,70.04 J3.7 J3.8
Y-MOTOR-2
  Bottom 2: Y-MOTOR.2 164.3,69.78 162.87,68.35 144.95,68.35 142.4,70.9 J3.5 J3.6
Y-MOTOR-3
  Bottom 2: Y-MOTOR.3 164.32,72.92 161.9,70.5 146.2,70.5 144.94,71.76 J3.3 J3.4
Y-MOTOR-4
  Bottom 2: Y-MOTOR.4 165.03,76.78 160.91,72.65 148.03,72.65 J3.1 J3.2
Y-MOTOR-5  (1 unrouted)
Y-MOTOR-6  (1 unrouted)
Y-MOTOR-7  (1 unrouted)
Y-MOTOR-8  (1 unrouted)
YCARGND  (via drill 3.2 pad 6, 5.1 pad 10, 7.25 pad 12)
  other vias: 262.27,464.9 228.27,464.9 226.27,454.9 278.27,454.9 226.27,388.9 278.27,388.9 262.27,378.9 228.27,378.9 206.77,375.9 298.77,375.9 298.77,467.9 206.77,467.9 258.27,454.9 258.27,388.9
  pour Top (isolate 0.406): 203.17,469.9 205.17,471.9 301.17,471.9 303.17,469.9 303.17,373.9 301.17,371.9 205.17,371.9 203.17,373.9
  pour Bottom (isolate 0.406): 203.17,469.9 205.17,471.9 301.17,471.9 303.17,469.9 303.17,373.9 301.17,371.9 205.17,371.9 203.17,373.9
YIDLERGND  (via drill 5.1 pad 10, 5.1 pad 8)
  other vias: 172.4,403 190.7,392.7
  pour Top (isolate 0.406): 165,430.8 165,394.7 167.4,392.3 183.6,392.3 188.1,387.8 193.8,387.8 196,390 196,431.2 194.1,433.1 167.3,433.1
  pour Bottom (isolate 0.406): 164.9,430.9 164.9,394.8 167.3,392.4 183.5,392.4 188,387.9 193.7,387.9 195.9,390.1 195.9,431.3 194,433.2 167.2,433.2
YMOTORGND  (via drill 3.2 pad 6)
  other vias: 134.9,117.83
Z-ENDSTOP-C
  Bottom 0.406: Z-CONN.9 28.48,238.11 19.81,229.45 19.81,195.9 24.06,191.66 24.06,165.44 27.5,162 33.47,162 ZENDSTOP.C
Z-ENDSTOP-NO
  Bottom 0.406: ZENDSTOP.NO 39.7,158.6 37.9,160.4 35.86,160.4 33.7,162.56 27.73,162.56 24.62,165.67 24.62,191.89 20.37,196.14 20.37,229.21 28.56,237.4 29.2,237.4 30,238.2 30,240.98 29.18,241.8 Z-CONN.10
Z-MOTOR-1
  Bottom 2: J2.8 J2.7 21.84,112.8 21.44,112.4 21.44,96.46 10.3,85.32 10.3,84.62 Z-MOTOR.1
Z-MOTOR-2
  Bottom 2: J2.6 J2.5 19.2,113.7 19.2,97.38 Z-MOTOR.2
Z-MOTOR-3
  Bottom 2: J2.4 J2.3 16.96,113.6 16.96,98.28 Z-MOTOR.3
Z-MOTOR-4
  Bottom 2: J2.2 J2.1 14.22,112.8 14.72,112.3 14.72,99.22 8.78,93.28 Z-MOTOR.4
Z-MOTOR-5  (1 unrouted)
Z-MOTOR-6  (1 unrouted)
Z-MOTOR-7  (1 unrouted)
Z-MOTOR-8  (1 unrouted)
ZCARGND  (via drill 5.1 pad 10)
  other vias: 29.57,156.1
ZMOTORGND  (7 unrouted)
ZTEEGND  (via drill 3.2 pad 6)
  other vias: 6.69,102.7

## Text on the board
tPlace: HOTEND | EXT-FAN | PART-FAN | - | + | -
bPlace: PART-FAN | - | + | -